# Altium PCB RobotCtrl_V2_Core-board.PcbDoc
Units mil, origin at the board's own origin, x right, y up, seen from the top; angles counter-clockwise.
Board outline 1880 x 1545 mil, 2 copper layers (Top Layer, Bottom Layer); 44 components, 126 nets, 358 pads, 174 vias.
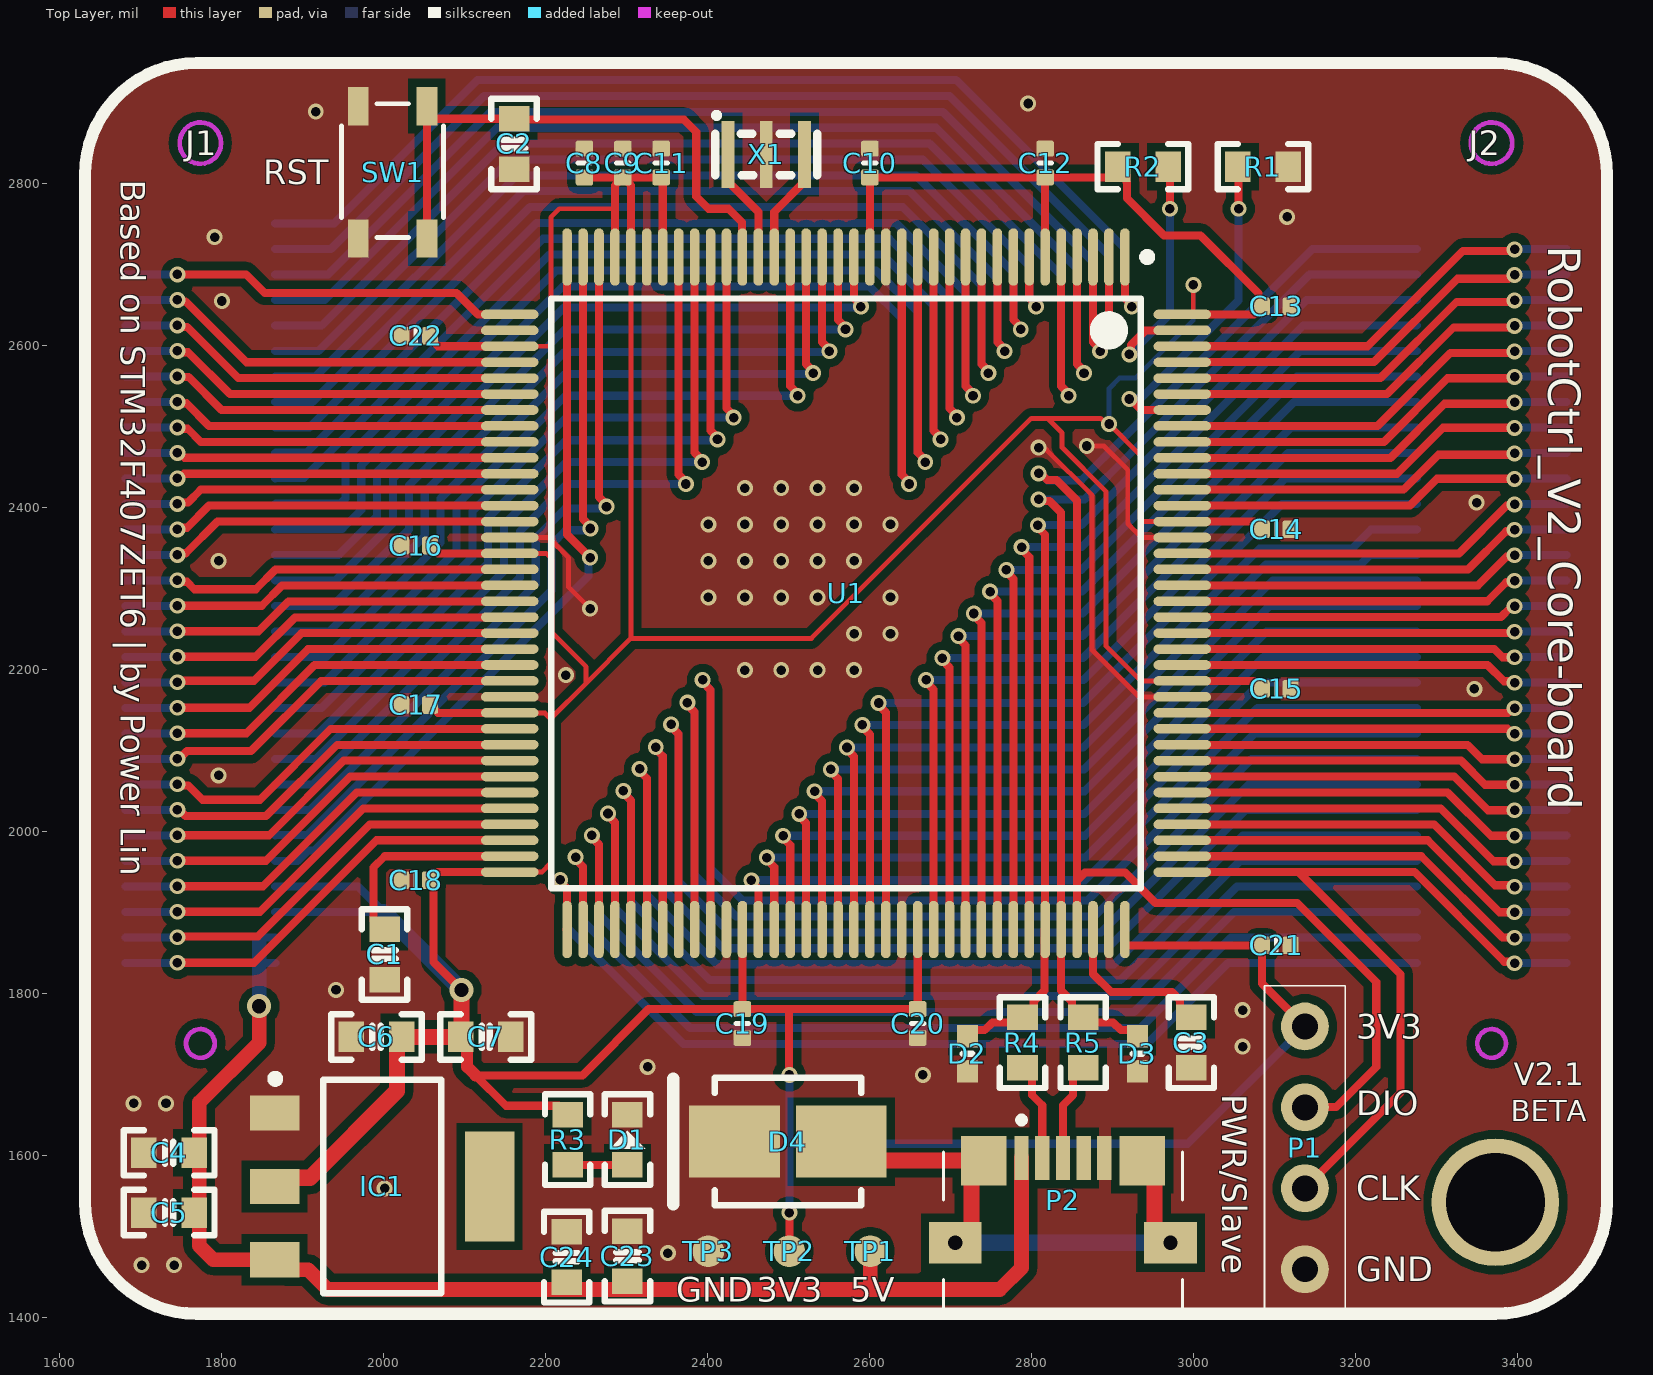
[diagram p0: Top Layer view]
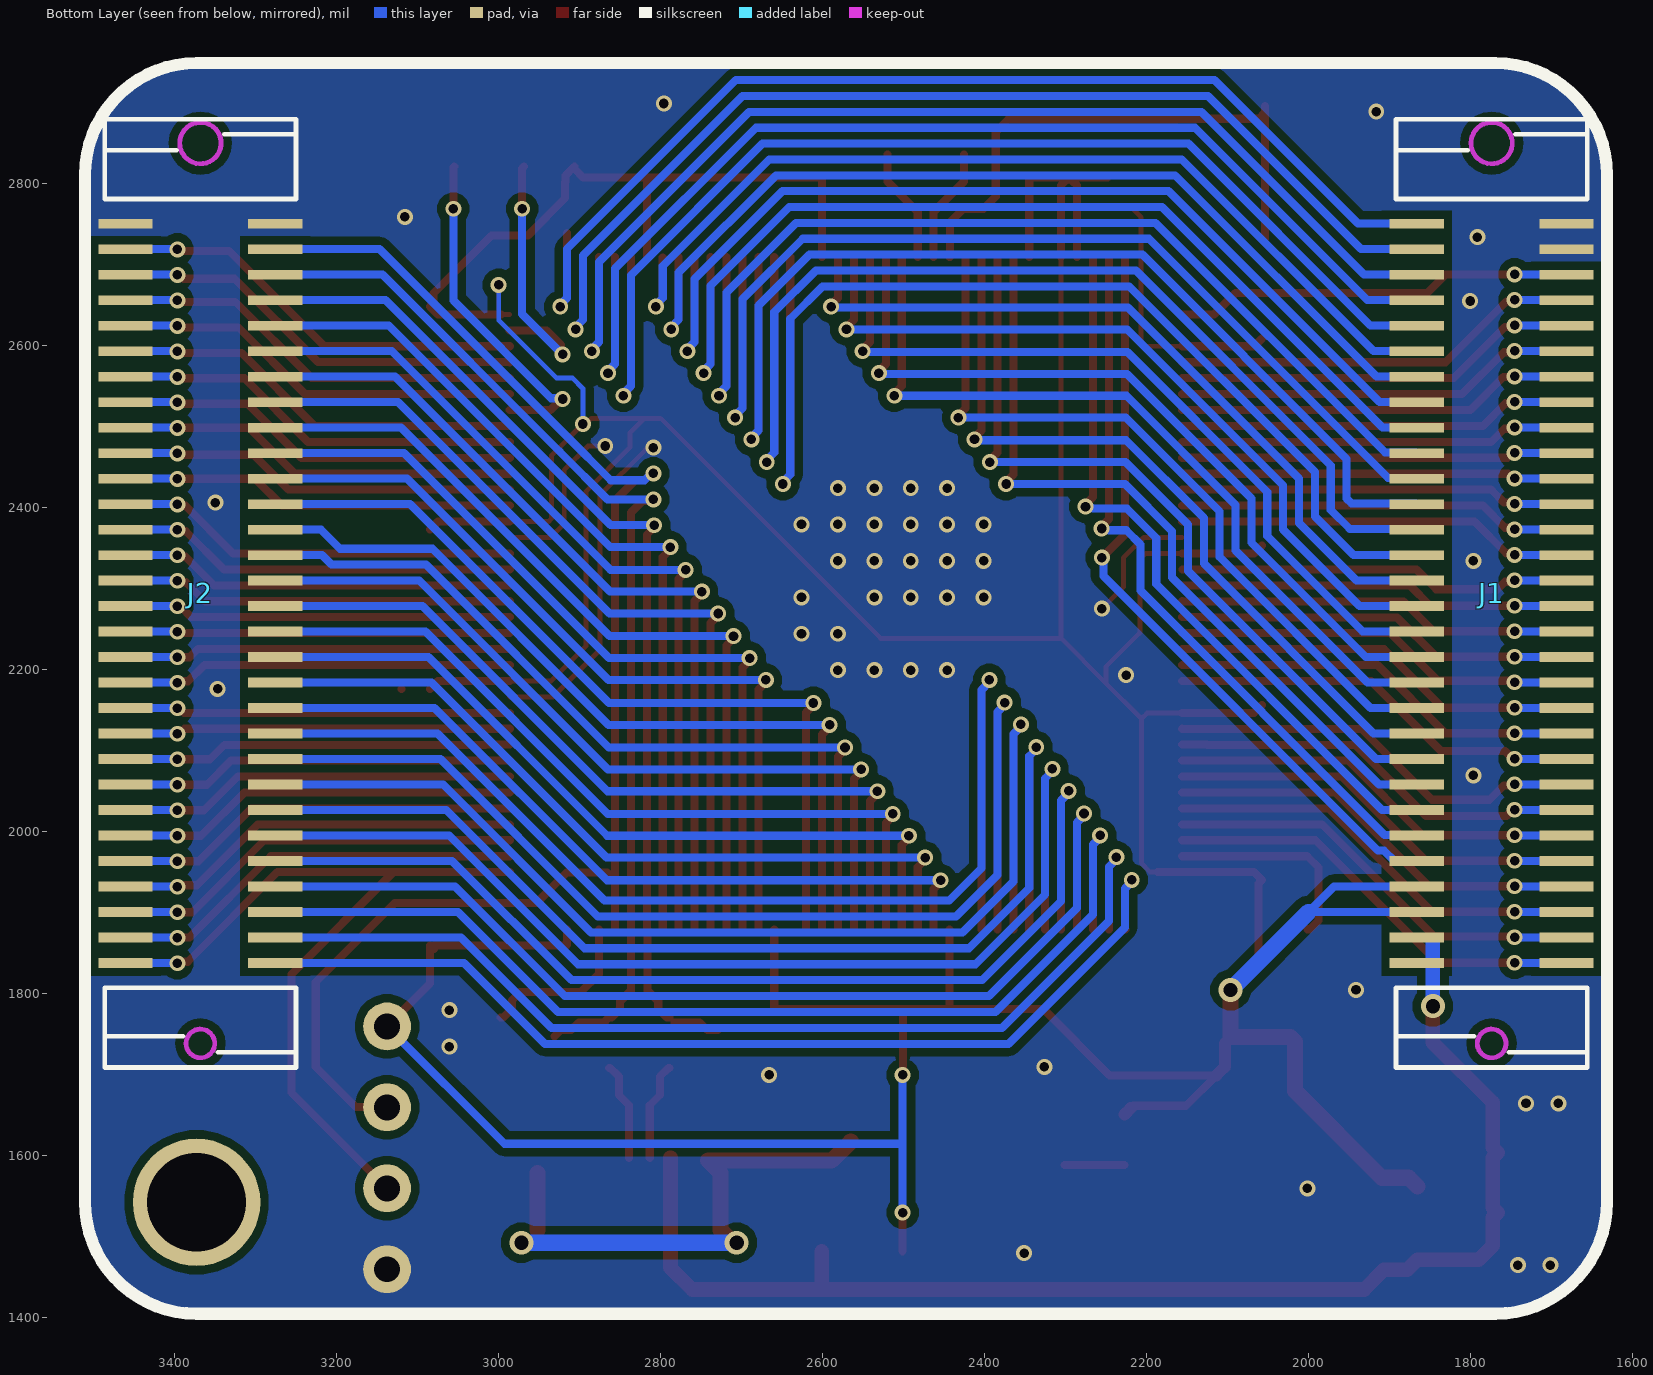
[diagram p1: Bottom Layer view, seen from below]
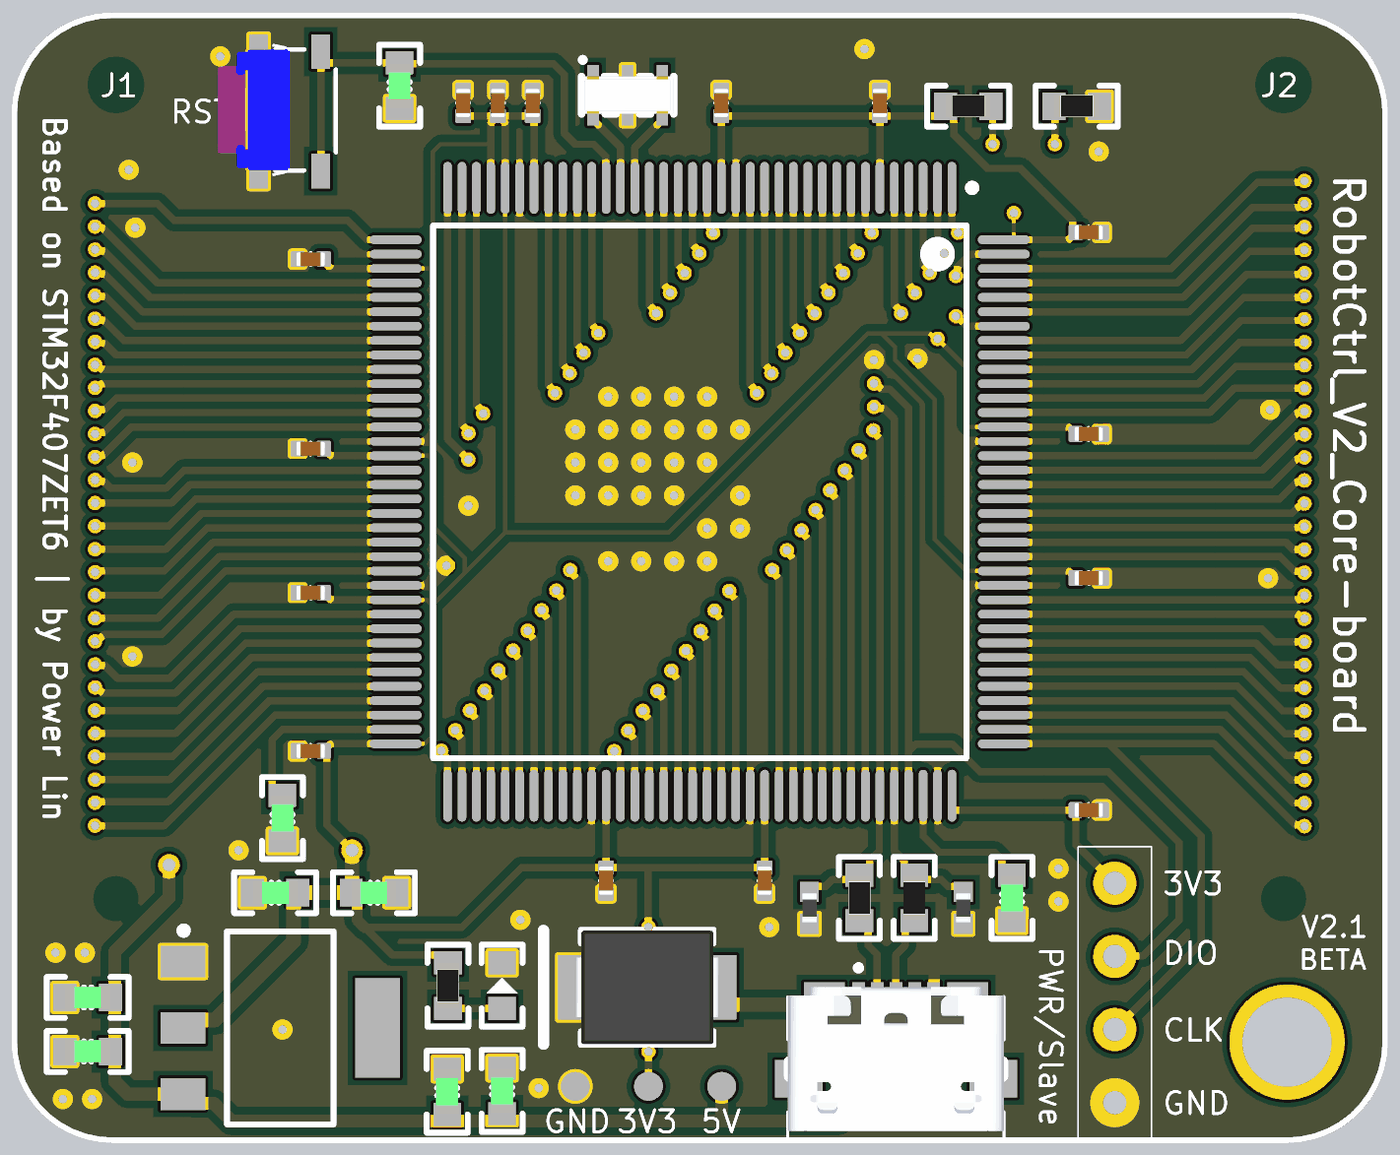
[diagram p2: 3D render of the assembled board from above, using the file's embedded part models]

## Layer stack, top to bottom
Top Solder: solder mask 0.4, Solder Resist, Dk 3.5
Top Layer: signal copper 1.4
Dielectric 1: dielectric 12.6, FR-4, Dk 4.8
Bottom Layer: signal copper 1.4
Bottom Solder: solder mask 0.4, Solder Resist, Dk 3.5

## Board outline
1768.8,1404 cw(c1768.8,1541.8) 1631,1541.8 1631,2811.2 cw(c1768.8,2811.2) 1768.8,2949 3373.2,2949 cw(c3373.2,2811.2) 3511,2811.2 3511,1541.8 cw(c3373.2,1541.8) 3373.2,1404

## Design rules (kind name [scope] priority, off if disabled: settings)
Clearance [All] p1: gap=10 ignorepadtopadclearanceinfootprint=FALSE except(0: Arc-Hole Track-Hole SMDPad-Hole THPad-Hole Via-Hole Fill-Hole Poly-Hole Region-Hole Text-Hole; 2: Arc-SMDPad Track-SMDPad SMDPad-SMDPad; 9.6: Arc-Arc Arc-Track Track-Track)
PlaneConnect [All] p1: planeconnectstyle=Direct reliefexpansion=20 reliefentries=4 reliefconductorwidth=10 reliefairgap=10
PolygonConnect [All] p1: connectstyle=Direct reliefconductorwidth=10 reliefentries=4 polygonreliefangle="90 Angle" airgapwidth=10
RoutingVias [All] p1: holewidth=11.81 width=19.68 viastyle="Through Hole" minholewidth=11.81 minwidth=19.68 maxholewidth=11.81 maxwidth=19.68
SolderMaskExpansion [All] p1: expansion=4 istentingtop=FALSE
Width [All] p1: maxlimit=100 minlimit=6 preferedwidth=10
29 further rules are at their usual default settings.

## Components (designator, comment, footprint, x,y, rotation, side; value= is the part's Value field where it differs from the comment)
C1 "2.2uF" CAP-0603 2001,1847.9 r270 top
C2 "100nF" CAP-0603 2161,2849 r90 top
C3 "2.2uF" CAP-0603 2997.55,1738.9 r270 top
C4 "10uF" CAP-0603 1734.9,1602.88 r0 top
C5 "100nF" CAP-0603 1734.9,1529 r0 top
C6 "100nF" CAP-0603 1991,1746.01 r0 top
C7 "10uF" CAP-0603 2126,1746.01 r180 top
C8 "1uF" CAP-0402 2247.94,2825.46 r270 top
C9 "100nF" CAP-0402 2295.35,2825.46 r270 top
C10 "10uF" CAP-0402 2600.53,2825.46 r270 top
C11 "100nF" CAP-0402 2342.77,2825.46 r270 top
C12 "100nF" CAP-0402 2817.06,2825.46 r270 top
C13 "100nF" CAP-0402 3102.46,2648.49 r180 top
C14 "100nF" CAP-0402 3102.46,2373 r180 top
C15 "100nF" CAP-0402 3102.46,2176 r180 top
C16 "100nF" CAP-0402 2039.54,2353 r0 top
C17 "100nF" CAP-0402 2039.54,2156 r0 top
C18 "100nF" CAP-0402 2039.54,1939.72 r0 top
C19 "100nF" CAP-0402 2443.05,1762.54 r90 top
C20 "100nF" CAP-0402 2659.58,1762.54 r90 top
C21 "100nF" CAP-0402 3102.46,1859 r180 top
C22 "100nF" CAP-0402 2039.54,2612 r0 top
C23 "10uF" CAP-0603 2301,1475.1 r270 top
C24 "100nF" CAP-0603 2226,1474 r270 top
D1 "RED" LED-0603 2301,1619 r90 top
D2 "PESD0402-140" D-0402 2721,1725.22 r90 top
D3 "PESD0402-140" D-0402 2931,1725.22 r90 top
D4 "SMBJ15CA" DO-214AA/SMB 2499.27,1616.71 r0 top
IC1 "AMS1117-3.3" SOT-223 1991,1537.3 r270 top
J1 "3710M060037G3FT01" 3710M060037G3FT01 1866.04,1837.31 r0 bottom locked
J2 "3710M060037G3FT01" 3710M060037G3FT01 3461,1837.31 r0 bottom locked
P1 "HDR1x4_2.54" HDR1X4_2.54 3137.91,1459 r180 top
P2 "MicroQTJ" USB-MICRO 2839,1518.75 r0 top
R1 "10k" R-0603 3086,2821 r180 top
R2 "120R" R-0603 2937.71,2821 r0 top
R3 "4.7k" R-0603 2227.12,1619 r90 top
R4 "10R" R-0603 2789,1738.9 r270 top
R5 "10R" R-0603 2864,1738.9 r270 top
SW1 "KEY" KEY-4P-4.2*3.4*2.5 2011,2814 r270 top
TP1 "TestPoint" TestPoint 2601,1481.29 r90 top
TP2 "TestPoint" TestPoint 2501,1481.29 r90 top
TP3 "TestPoint" TestPoint 2401,1481.29 r90 top
U1 "STM32F407ZET6" STM-LQFP144_N 2571,2294 r270 top locked
X1 "8MHz" SMD3213-3P 2472.5,2836 r0 top

## Footprints (in the part's own frame and the unit in brackets; to place one, negate y for a bottom-side part, rotate by r counter-clockwise, add the part's x,y. Pads: shape width x height; smd on the part's side, far side on the other; paste and mask are expansions set on the pad)
3710M060037G3FT01 [mm]
  rect 1.7x0.3 smd: 1(-4.7,0) 2(-4.7,-0.8) 3(-4.7,-1.6) 4(-4.7,-2.4) 5(-4.7,-3.2) 6(-4.7,-4) 7(-4.7,-4.8) 8(-4.7,-5.6) 9(-4.7,-6.4) 10(-4.7,-7.2) 11(-4.7,-8) 12(-4.7,-8.8) 13(-4.7,-9.6) 14(-4.7,-10.4) 15(-4.7,-11.2) 16(-4.7,-12) 17(-4.7,-12.8) 18(-4.7,-13.6) 19(-4.7,-14.4) 20(-4.7,-15.2) 21(-4.7,-16) 22(-4.7,-16.8) 23(-4.7,-17.6) 24(-4.7,-18.4) 25(-4.7,-19.2) 26(-4.7,-20) 27(-4.7,-20.8) 28(-4.7,-21.6) 29(-4.7,-22.4) 30(-4.7,-23.2) 31(0,-23.2) 32(0,-22.4) 33(0,-21.6) 34(0,-20.8) 35(0,-20) 36(0,-19.2) 37(0,-18.4) 38(0,-17.6) 39(0,-16.8) 40(0,-16) 41(0,-15.2) 42(0,-14.4) 43(0,-13.6) 44(0,-12.8) 45(0,-12) 46(0,-11.2) 47(0,-10.4) 48(0,-9.6) 49(0,-8.8) 50(0,-8) 51(0,-7.2) 52(0,-6.4) 53(0,-5.6) 54(0,-4.8) 55(0,-4) 56(0,-3.2) 57(0,-2.4) 58(0,-1.6) 59(0,-0.8) 60(0,0)
  Keep-Out Layer circle w0.152: c-2.35,-25.725 r0.65
  Keep-Out Layer circle w0.152: c-2.35,2.525 r0.45
  silkscreen extent -5.35,-26.47 0.65,3.27
CAP-0402 [mm]
  rrect25% 0.5x0.55 smd: 1(-0.45,0) 2(0.45,0)
  silkscreen extent 0,-0.2 0,0.2, body extent -0.5,-0.25 0.5,0.25, height 0.6
CAP-0603 [mm]
  rect 0.8x0.96 smd: 1(-0.79,0) 2(0.79,0)
  silkscreen extent -1.42,-0.71 1.42,0.71, body extent -0.76,-0.39 0.76,0.39, height 0.9
D-0402 [mm]
  rect 0.7x0.65 smd: 1(-0.55,0) 2(0.55,0)
  silkscreen extent 0,-0.15 0,0.15, body extent -0.5,-0.25 0.5,0.25, height 0.43
DO-214AA/SMB [mm]
  rect 2.85x2.25 smd: 1(1.675,0) 2(-1.675,0)
  silkscreen extent -3.6,-2 2.3,2, body extent -2.5,-1.97 2.5,1.97, height 2.44
HDR1X4_2.54 [mm]
  round 1.5 hole 0.813: 1(0,0) 2(0,-2.54) 3(0,-5.08) 4(0,-7.62)
  silkscreen extent -1.27,-8.89 1.27,1.27
KEY-4P-4.2*3.4*2.5 [mm] "SKRPABE010"
  rect 1.2x0.65 smd: 1(-2.075,1.075) 1(2.075,1.075) 2(-2.075,-1.075) 2(2.075,-1.075)
  silkscreen extent -2.15,-1.6 2.05,1.6, body extent -2.35,-1.6 2.25,1.6, height 2.5
LED-0603 [mm]
  rect 0.8x0.96 smd: 1(-0.79,0) 2(0.79,0)
  silkscreen extent -1.42,-0.71 1.42,0.71, body extent -0.81,-0.4 0.81,0.4, height 0.6
R-0603 [mm]
  rect 0.8x0.96 smd: 1(-0.79,0) 2(0.79,0)
  silkscreen extent -1.42,-0.71 1.42,0.71, body extent -0.76,-0.38 0.76,0.38, height 0.41
SMD3213-3P [mm]
  rect 0.4x2.1 smd: 1(-1.2,0) 2(0,0) 3(1.2,0)
  silkscreen extent -1.6,-0.65 1.6,1.27, body extent -1.6,-0.65 1.6,0.65, height 0.7
SOT-223 [mm]
  rect 1.1x1.55 smd: 1(-2.91,-3.197) 2(-0.61,-3.197) 3(1.69,-3.197)
  rect 3.45x1.55 smd: 4(-0.61,3.553)
  silkscreen extent -4.11,-3.3 2.74,2.03, body extent -3.88,-3.38 2.62,3.58, height 1.7
STM-LQFP144_N [mm] "Thin QFP, 144-Leads, Body 20x20mm, Pitch 0.5mm, IPC Medium Density"
  oval 1.8x0.3 smd: 1(-10.55,8.75) 2(-10.55,8.25) 3(-10.55,7.75) 4(-10.55,7.25) 5(-10.55,6.75) 6(-10.55,6.25) 7(-10.55,5.75) 8(-10.55,5.25) 9(-10.55,4.75) 10(-10.55,4.25) 11(-10.55,3.75) 12(-10.55,3.25) 13(-10.55,2.75) 14(-10.55,2.25) 15(-10.55,1.75) 16(-10.55,1.25) 17(-10.55,0.75) 18(-10.55,0.25) 19(-10.55,-0.25) 20(-10.55,-0.75) 21(-10.55,-1.25) 22(-10.55,-1.75) 23(-10.55,-2.25) 24(-10.55,-2.75) 25(-10.55,-3.25) 26(-10.55,-3.75) 27(-10.55,-4.25) 28(-10.55,-4.75) 29(-10.55,-5.25) 30(-10.55,-5.75) 31(-10.55,-6.25) 32(-10.55,-6.75) 33(-10.55,-7.25) 34(-10.55,-7.75) 35(-10.55,-8.25) 36(-10.55,-8.75) 73(10.55,-8.75) 74(10.55,-8.25) 75(10.55,-7.75) 76(10.55,-7.25) 77(10.55,-6.75) 78(10.55,-6.25) 79(10.55,-5.75) 80(10.55,-5.25) 81(10.55,-4.75) 82(10.55,-4.25) 83(10.55,-3.75) 84(10.55,-3.25) 85(10.55,-2.75) 86(10.55,-2.25) 87(10.55,-1.75) 88(10.55,-1.25) 89(10.55,-0.75) 90(10.55,-0.25) 91(10.55,0.25) 92(10.55,0.75) 93(10.55,1.25) 94(10.55,1.75) 95(10.55,2.25) 96(10.55,2.75) 97(10.55,3.25) 98(10.55,3.75) 99(10.55,4.25) 100(10.55,4.75) 101(10.55,5.25) 102(10.55,5.75) 103(10.55,6.25) 104(10.55,6.75) 105(10.55,7.25) 106(10.55,7.75) 107(10.55,8.25) 108(10.55,8.75)
  oval 0.3x1.8 smd: 37(-8.75,-10.55) 38(-8.25,-10.55) 39(-7.75,-10.55) 40(-7.25,-10.55) 41(-6.75,-10.55) 42(-6.25,-10.55) 43(-5.75,-10.55) 44(-5.25,-10.55) 45(-4.75,-10.55) 46(-4.25,-10.55) 47(-3.75,-10.55) 48(-3.25,-10.55) 49(-2.75,-10.55) 50(-2.25,-10.55) 51(-1.75,-10.55) 52(-1.25,-10.55) 53(-0.75,-10.55) 54(-0.25,-10.55) 55(0.25,-10.55) 56(0.75,-10.55) 57(1.25,-10.55) 58(1.75,-10.55) 59(2.25,-10.55) 60(2.75,-10.55) 61(3.25,-10.55) 62(3.75,-10.55) 63(4.25,-10.55) 64(4.75,-10.55) 65(5.25,-10.55) 66(5.75,-10.55) 67(6.25,-10.55) 68(6.75,-10.55) 69(7.25,-10.55) 70(7.75,-10.55) 71(8.25,-10.55) 72(8.75,-10.55) 109(8.75,10.55) 110(8.25,10.55) 111(7.75,10.55) 112(7.25,10.55) 113(6.75,10.55) 114(6.25,10.55) 115(5.75,10.55) 116(5.25,10.55) 117(4.75,10.55) 118(4.25,10.55) 119(3.75,10.55) 120(3.25,10.55) 121(2.75,10.55) 122(2.25,10.55) 123(1.75,10.55) 124(1.25,10.55) 125(0.75,10.55) 126(0.25,10.55) 127(-0.25,10.55) 128(-0.75,10.55) 129(-1.25,10.55) 130(-1.75,10.55) 131(-2.25,10.55) 132(-2.75,10.55) 133(-3.25,10.55) 134(-3.75,10.55) 135(-4.25,10.55) 136(-4.75,10.55) 137(-5.25,10.55) 138(-5.75,10.55) 139(-6.25,10.55) 140(-6.75,10.55) 141(-7.25,10.55) 142(-7.75,10.55) 143(-8.25,10.55) 144(-8.75,10.55)
  silkscreen extent -10.67,-9.25 9.25,9.58, body extent -10,-10 10,10, height 1.6
TestPoint [mm]
  round 1 smd: 1(0,0)
USB-MICRO [mm]
  rect 0.45x1.38 smd: 1(-1.3,1.975) 2(-0.65,1.975) 3(0,1.975) 4(0.65,1.975) 5(1.3,1.975)
  rect 1.65x1.3 smd: EH(-3.375,-0.685) EH(3.375,-0.685)
  rect 1.425x1.55 smd: EH(-2.487,1.89) EH(2.487,1.89)
  silkscreen extent -3.75,-2.84 3.75,3.26, body extent -3.9,-2.5 3.9,2.5, height 2.72

## Part data
C1 C2 C3 C4 C5 C6 C7 C8 C9 C10 C11 C12 C13 C14 C15 C16 C17 C18 C19 C20 C21 C22 C23 C24: library part CAP, "贴片电容", Package=0402, SuppliersPartNumber=C52923, ComponentLink1Description=供应商链接, ComponentLink1URL=http://www.szlcsc.com/product/details_53938.html, Supplier=LC
D1: library part LED, "发光二极管", Package=0603, SuppliersPartNumber=C2290, ComponentLink1Description=供应商链接, ComponentLink1URL=http://www.szlcsc.com/product/details_2663.html, Supplier=LC
D2 D3 D4: library part TVS_C
IC1: library part AMS1117, "AMS1117-3.3 1.0A", Manufacturer_Name=Nexperia, Manufacturer_Part_Number=SI2302DS, Mouser Part Number=N/A, RS Part Number=7983053P, Datasheet Link=https://assets.nexperia.com/documents/data-sheet/SI2302DS.pdf, Height=1.1mm, Mouser Price/Stock=https://www.mouser.com/Search/Refine.aspx?Keyword=N%2FA, RS Price/Stock=http://uk.rs-online.com/web/p/products/7983053P
J1 J2: library part 3710M/F, "B2B Connector"
P1: "Header"
P2: library part USB_MICRO, "USB_MICRO"
R1 R2 R3 R4 R5: library part RES, "贴片电阻", Package=0805, SuppliersPartNumber=C17798, Supplier=LC
SW1: "按键开关"
TP1 TP2 TP3: "测试点"
U1: "ARM Cortex-M4 32-bit MCU+FPU, 210 DMIPS, 512 kB Flash, 192 kB Internal RAM, 114 I/Os, 144-pin LQFP, -40 to 85 degC, Tray", I/Os (High Current)=114, Manufacturer=STMicroelectronics, Operating Frequency(F) (Processor speed) (MHz)=168, Supplier Part Number 1=497-11903-ND, Supply Voltage(Vcc) max (V)=3.6, Supply Voltage(Vcc) min (V)=1.8, ComponentLink1Description="Manufacturer URL", ComponentLink1URL=http://www.st.com/web/en/home.html, ComponentLink2Description=Datasheet, ComponentLink2URL=http://www.st.com/st-web-ui/static/active/en/resource/technical/document/datasheet/DM00037051.pdf, ComponentLink3Description="Package Specification", ComponentLink3URL=http://www.st.com/st-web-ui/static/active/en/resource/technical/document/datasheet/DM00037051.pdf, Core="ARM Cortex-M4", D/A Converter=2x12-bit, DatasheetVersion="Rev. 4", FLASH Size (Prog) (kB)=512, Internal RAM Size (kB)=192, Mounting Technology="Surface Mount", PackageDescription="144-Pin Low Profile Quad Flat Package, 20 x 20 mm Body, 0.5 mm Pitch", PackageReference=LQFP144, PackageVersion="Rev. 4, 06/2013", Packing=Tray, PartNumber=STM32F407ZET6, Supplier 1=Digi-Key, Supplier 2=Farnell, Supplier 3=Newark, Supplier 4=Newark, Supplier 5=Mouser, Supplier Part Number 2=2215229, Supplier Part Number 3=46W2203, Supplier Part Number 4=87T3795, Supplier Part Number 5=511-STM32F407ZET6
X1: library part XTAL, "CSTCE8M00G15C99-R0"

## Free pads (board coordinates)
  round 157.48 hole 122.05: 2(3373.2,1541.8)

## Via types
v1: diameter 19.68, hole 11.81, Top Layer to Bottom Layer, 170 vias
v2: diameter 29.53, hole 17.72, Top Layer to Bottom Layer, 4 vias

## Nets (pads, with @x,y where several pads share a name; then routed paths per layer and width w, separated by ;. In a path a pad name is that pad's centre, name@x,y a point inside that pad or via, vN(x,y) a via of type N, cw(c..) or ccw(c..) an arc to the next point about the centre after c; other vN are vias at no path point)
GND: C1.2 C2.1 C3.2 C4.1 C5.1 C6.1 C7.1 C8.1 C9.1 C10.1 C11.1 C12.1 C13.1 C14.1 C15.1 C16.1 C17.1 C18.1 C19.1 C20.1 C21.1 C22.1 C23.1 C24.1 D1.2 D2.1 D3.1 D4.2 IC1.1 J1.29 J1.30 J2.30 J2.31 P1.1 P2.5 R1.1 SW1.2 TP3.1 U1.16 U1.31 U1.38 U1.51 U1.61 U1.83 U1.94 U1.107 U1.120 U1.130 X1.2 | length 777.6
  Top Layer w6: U1.51 2203.16,2362.9 2228.33,2337.73 2228.33,2301.67 v1(2255,2275) ; v1(2809,2474) 2811.62,2471.38 2818.51,2471.38 2875,2414.89 2875,2223.94 2932.89,2166.05 U1.120 ; v1(2868.36,2475.95) 2889.54,2475.95 2919,2446.49 2919,2380.04 2936.14,2362.9 U1.130
  Top Layer w10: C15.1 C15.1@3120.25,2175.92 ; v1@3347.22,2175.92 v1(3347.3,2175.84)
  other v1: 1701,1464 1741,1464 2351,1479 2001,1559 1691,1664 1731,1664 2666,1699 2326,1709 3061,1734 3061,1779 1941,1804 1796,2069 2225,2193 2446,2199 2491,2199 2536,2199 2581,2199 2581,2244 2626,2244 2401,2289 2446,2289 2491,2289 2536,2289 2626,2289 1796,2334 2401,2334 2446,2334 2491,2334 2536,2334 2581,2334 2401,2379 2446,2379 2491,2379 2536,2379 2581,2379 2626,2379 3350,2406 2446,2424 2491,2424 2536,2424 2581,2424 1800,2655 1791,2734 3116,2759 1916,2889 2796,2899
NetC1_1: C1.1 U1.71 | length 258.1
  Top Layer w10: C1.1 1997.85,1879 1987.1,1889.75 1987.1,1955.1 2001.2,1969.2 U1.71
NetC2_2: C2.2 SW1.1 U1.25 | length 698.9
  Top Layer w10: SW1.1@2053.32,2732.31 SW1.1@2053.32,2887.9 ; SW1.1@2053.32,2895.69 SW1.1@2053.32,2887.9 ; U1.25 2442.7,2709.7 2442.7,2752.3 2426,2769 2401,2769 2386,2784 2386,2864 2371,2879 2162.1,2879 C2.2 2061.12,2880.1 SW1.1@2053.32,2887.9
NetC3_1: C3.1 U1.106 | length 204.7
  Top Layer w10: U1.106 2876.12,1823.88 2898.66,1801.34 2973.66,1801.34 2983.66,1791.34 2983.66,1780.75 2994.4,1770 C3.1
NetD1_A: D1.1 R3.1 | length 73.9
  Top Layer w10: R3.1 D1.1
NetD4_1: D4.1 P2.EH | length 640.4
  Top Layer w20: D4.1 2588.75,1593.16 2741.09,1593.16 2726,1578.08 2726,1507.38 2710.41,1491.79 v2(2706.13,1491.79) ; P2.EH@2952,1507.38 P2.EH@2952,1578.08
  Bottom Layer w20: v2(2706.13,1491.79) v2(2971.87,1491.79)
NetP2_2: P2.2 R4.2 | length 122.1
  Top Layer w10: R4.2 2790.25,1707.8 2801,1697.05 2801,1674 2813.41,1661.59 P2.2
NetP2_3: P2.3 R5.2 | length 122.1
  Top Layer w10: P2.3 2839,1661.59 2851.41,1674 2851.41,1697.05 2862.16,1707.8 R5.2@2863.41,1707.8
NetR1_2: R1.2 U1.138 | length 422.2
  Top Layer w10: v1(2921,2534) 2922.3,2534 2935.92,2520.38 U1.138 ; R1.2 3056,2819.9 v1(3056,2769)
  Bottom Layer w10: v1(2921,2534) 2921.93,2534.93 2935.21,2534.93 3056,2655.72 v1(3056,2769)
NetR2_2: R2.2 U1.143 | length 337.2
  Top Layer w10: v1(2921,2589) 2922.85,2590.85 2922.85,2600.85 2940.8,2618.8 U1.143 ; R2.2 2971,2818.81 v1(2971,2769)
  Bottom Layer w10: v1(2921,2589) 2971,2639 v1(2971,2769)
NetU1_23: U1.23 X1.3 | length 142.2
  Top Layer w10: U1.23 2482.42,2765.06 2519.89,2802.54 X1.3@2519.89,2836
NetU1_24: U1.24 X1.1 | length 142.2
  Top Layer w10: X1.1 2425.26,2802.54 2462.73,2765.06 U1.24
PA0: J1.54 U1.34 | length 910
  Top Layer w10: U1.34 2265.88,2412.89 2275.15,2403.62 v1(2275.15,2401)
  Bottom Layer w10: J1.54 1908.72,2026.28 2187.8,2305.36 2187.8,2362.5 2224.14,2398.84 2266.14,2398.84 2266.45,2399.15 2273.3,2399.15 v1(2275.15,2401)
PA1: J1.55 U1.35 | length 918.3
  Top Layer w10: U1.35 2246.2,2385.57 2255.15,2376.62 v1(2255.15,2374)
  Bottom Layer w10: J1.55 1866.88,1995.63 1905.78,1995.63 2207.4,2297.24 2207.4,2354.38 2224.86,2371.84 2246.14,2371.84 2246.45,2372.15 2253.3,2372.15 v1@2254.85,2373.7
PA2: J1.56 U1.36 | length 939.6
  Top Layer w10: U1.36 2226.51,2366.49 v1(2255,2338)
  Bottom Layer w10: J1.56 1893.6,1963.29 1906.33,1976.03 1913.9,1976.03 2253.15,2315.27 2253.15,2336.15 v1(2255,2338)
PA3: J1.28 U1.37 | length 494.9
  Top Layer w10: v1(1745,2688.01) 1830,2688.01 1853.01,2665 2090,2665 2116.51,2638.49 U1.37
  Bottom Layer w10: J1.28 v1@1744.69,2687.7
PA4: J1.27 U1.40 | length 506.3
  Top Layer w10: v1(1745,2656.51) 1746.85,2654.66 1755.34,2654.66 1830.57,2579.43 U1.40
  Bottom Layer w10: J1.27 v1@1744.69,2656.2
PA5: J1.26 U1.41 | length 501.4
  Top Layer w10: v1(1745,2625.02) 1746.85,2623.16 1756.84,2623.16 1820.25,2559.75 U1.41
  Bottom Layer w10: J1.26 v1@1744.69,2624.71
PA6: J1.25 U1.42 | length 496.5
  Top Layer w10: v1(1745,2593.52) 1746.83,2591.69 1758.31,2591.69 1809.94,2540.06 U1.42
  Bottom Layer w10: J1.25 v1@1744.69,2593.21
PA7: J1.24 U1.43 | length 491.6
  Top Layer w10: v1(1745,2562.02) 1746.08,2560.95 1759.05,2560.95 1799.62,2520.38 U1.43
  Bottom Layer w10: J1.24 v1@1744.69,2561.72
PA8: J2.24 U1.100 | length 1058.1
  Top Layer w10: v1(2749,2296) 2749,2293.38 2758.01,2284.37 U1.100
  Bottom Layer w10: v1(2749,2296) 2862.59,2296 3128.31,2561.72 J2.24
PA9: J2.25 U1.101 | length 1066.8
  Top Layer w10: v1(2769,2323) 2769,2320.38 2777.69,2311.69 U1.101
  Bottom Layer w10: v1(2769,2323) 2861.87,2323 3132.09,2593.21 J2.25
PA10: J2.26 U1.102 | length 1077.6
  Top Layer w10: v1(2788,2351) 2788,2348.38 2797.38,2339 U1.102
  Bottom Layer w10: v1(2788,2351) 2862.15,2351 3135.86,2624.71 J2.26
PA11: D2.2 J2.27 R4.1 U1.103 | length 1266.2
  Top Layer w10: D2.2@2729.46,1754.33 2742.33,1754.33 2752,1764 R4.1@2783,1764 ; R4.1 2792.15,1770 2802.9,1780.75 2802.9,1789.9 2816.25,1803.25 U1.103@2816.25,1878.65 ; v1(2808,2378) 2808,2375.38 2817.06,2366.32 U1.103 2817.06,1878.13 U1.103@2817.11,1878.18
  Bottom Layer w10: v1(2808,2378) 2808.3,2378.3 2861.74,2378.3 3139.64,2656.2 J2.27
PA12: D3.2 J2.28 R5.1 U1.104 | length 1329.9
  Top Layer w10: v1(2809,2410) 2810.85,2408.15 2822.23,2408.15 2836.75,2393.63 U1.104 2836.75,1803.25 2850.1,1789.9 2850.1,1780.75 2860.85,1770 R5.1 2870,1764 2901,1764 2910.67,1754.33 2923.54,1754.33 D3.2
  Bottom Layer w10: v1(2809,2410) 2865.72,2410 2924.52,2468.8 3143.42,2687.7 J2.28
PA13: J2.29 P1.3 U1.105 | length 1823.2
  Top Layer w10: v1(2809,2442) 2811.62,2442 2818.78,2434.84 2818.86,2434.84 2819.7,2434 2831,2434 2856.43,2408.57 2856.43,1939.43 ; U1.105 2856.43,1939.43 ; P1.3 3138.49,1659.58 3176.58,1659.58 3226,1709 3226,1814 3128.42,1911.58 2953.42,1911.58 2916,1949 2866,1949 2856.43,1939.43
  Bottom Layer w10: v1(2809,2442) 2811.27,2442 2819.7,2433.57 2861.57,2433.57 2916.4,2488.4 3147.2,2719.2 J2.29
PA14: J2.60 P1.2 U1.109 | length 1012.6
  Top Layer w10: U1.109 3129.92,1949.51 ; P1.2 3256,1677.09 3256,1823.43 3129.92,1949.51 ; v1(3397,1837) 3395.15,1838.85 3384.15,1838.85 3273.49,1949.51 3129.92,1949.51
  Bottom Layer w10: v1@3397.31,1837.31 J2.60
PA15: J2.59 U1.110 | length 516.1
  Top Layer w10: U1.110 2986.44,1969.11 3281.61,1969.11 3382.05,1868.67 3396.82,1868.67 v1(3397,1868.5)
  Bottom Layer w10: v1@3397.31,1868.8 J2.59
PB0: J1.21 U1.46 | length 476.9
  Top Layer w10: v1(1745,2467.54) 1747.62,2467.54 1753.75,2461.41 2155.56,2461.41 U1.46
  Bottom Layer w10: J1.21 v1@1744.69,2467.23
PB1: J1.20 U1.47 | length 476.1
  Top Layer w10: v1@1745.41,2436.45 1748.03,2436.45 1753.22,2441.64 U1.47
  Bottom Layer w10: J1.20 v1@1744.69,2435.73
  other v1: 1745,2436.04
PB2: J1.19 U1.48 | length 481.5
  Top Layer w10: v1(1745,2404.54) 1746.79,2406.34 1758.34,2406.34 1773.95,2421.95 U1.48
  Bottom Layer w10: J1.19 v1@1744.69,2404.24
PB3: J2.40 U1.133 | length 493
  Top Layer w10: U1.133 3259.7,2421.95 3302.82,2465.07 3395.15,2465.07 v1(3397,2466.92)
  Bottom Layer w10: v1@3397.31,2467.23 J2.40
PB4: J2.39 U1.134 | length 497.9
  Top Layer w10: U1.134 3251.67,2441.64 3308.45,2498.42 v1(3397,2498.42)
  Bottom Layer w10: v1@3397.31,2498.72 J2.39
PB5: J2.38 U1.135 | length 502.7
  Top Layer w10: U1.135 3243.63,2461.32 3310.37,2528.06 3395.15,2528.06 v1(3397,2529.91)
  Bottom Layer w10: v1@3397.31,2530.22 J2.38
PB6: J2.37 U1.136 | length 507.6
  Top Layer w10: U1.136 3235.6,2481.01 3314.15,2559.56 3395.15,2559.56 v1(3397,2561.41)
  Bottom Layer w10: v1@3397.31,2561.72 J2.37
PB7: J2.36 U1.137 | length 512.5
  Top Layer w10: U1.137 3227.57,2500.69 3317.93,2591.05 3395.15,2591.05 v1(3397,2592.91)
  Bottom Layer w10: v1@3397.31,2593.21 J2.36
PB8: J2.35 U1.139 | length 509.3
  Top Layer w10: U1.139 U1.139 3239.3,2540.15 3321.7,2622.55 3395.15,2622.55 v1(3397,2624.4)
  Bottom Layer w10: v1@3397.31,2624.71 J2.35
PB9: J2.34 U1.140 | length 514.2
  Top Layer w10: U1.140 3016.55,2559.75 3016.72,2559.92 3231.36,2559.92 3325.48,2654.04 3395.15,2654.04 v1(3397,2655.9)
  Bottom Layer w10: v1@3397.31,2656.2 J2.34
PB10: J1.2 U1.69 | length 532.1
  Top Layer w10: v1(1745,1869.11) 1746.04,1870.15 1844.44,1870.15 1982.76,2008.48 2155.56,2008.48 U1.69
  Bottom Layer w10: J1.2 v1@1744.69,1868.8
PB11: J1.1 U1.70 | length 537
  Top Layer w10: v1(1745,1837.61) 1839.61,1837.61 1990.88,1988.88 U1.70
  Bottom Layer w10: J1.1 v1@1744.69,1837.31
PB12: J2.1 U1.73 | length 1278
  Top Layer w10: v1(2218,1940) 2218,1937.81 2226.51,1929.3 2226.51,1879.16 U1.73@2226,1878.65
  Bottom Layer w10: v1(2218,1940) 2218,1937.81 2226.51,1929.3 2226.51,1880.94 2370.09,1737.36 2942.91,1737.36 3042.86,1837.31 J2.1
PB13: J2.2 U1.74 | length 1306.6
  Top Layer w10: v1(2237,1968) 2237,1965.38 2246.2,1956.18 U1.74
  Bottom Layer w10: v1(2237,1968) 2237,1965.38 2246.2,1956.18 2246.2,1889.09 2378.24,1757.05 2934.76,1757.05 3046.51,1868.8 J2.2
PB14: J2.3 U1.75 | length 1332.6
  Top Layer w10: v1(2257,1995) 2257,1992.38 2265.88,1983.5 U1.75
  Bottom Layer w10: v1(2257,1995) 2257,1992.38 2265.88,1983.5 2265.88,1897.25 2386.39,1776.74 2926.61,1776.74 3050.17,1900.3 J2.3
PB15: J2.4 U1.76 | length 1358.7
  Top Layer w10: v1(2277,2022) 2277,2019.38 2285.57,2010.81 U1.76
  Bottom Layer w10: v1(2277,2022) 2277,2019.38 2285.57,2010.81 2285.57,1905.4 2394.55,1796.42 2918.45,1796.42 3053.83,1931.8 J2.4
PC0: J1.50 U1.26 | length 949.9
  Top Layer w10: U1.26 2423.36,2522.56 2432.3,2513.62 v1(2432.3,2511)
  Bottom Layer w10: J1.50 1922.99,2152.27 2109.4,2338.68 2109.4,2394.97 2225.43,2511 v1(2432.3,2511)
PC1: J1.51 U1.27 | length 959.2
  Top Layer w10: U1.27 2403.68,2495.24 2412.3,2486.62 v1(2412.3,2484)
  Bottom Layer w10: J1.51 1919.21,2120.77 2129,2330.56 2129,2386.86 2225.14,2483 v1@2413.3,2483
PC2: J1.52 U1.28 | length 969.8
  Top Layer w10: U1.28 2383.99,2467.93 2393.3,2458.62 v1(2393.3,2456)
  Bottom Layer w10: J1.52 1916.28,2089.28 2148.6,2321.6 2148.6,2378.74 2225.86,2456 v1(2393.3,2456)
PC3: J1.53 U1.29 | length 978.6
  Top Layer w10: U1.29 2364.31,2440.61 2373.3,2431.62 v1(2373.3,2429)
  Bottom Layer w10: J1.53 1912.5,2057.78 2168.2,2313.48 2168.2,2370.62 2226.58,2429 v1(2373.3,2429)
PC4: J1.23 U1.44 | length 486.7
  Top Layer w10: v1(1745,2530.53) 1746.85,2528.67 1756.33,2528.67 1784.31,2500.69 U1.44
  Bottom Layer w10: J1.23 v1@1744.69,2530.22
PC5: J1.22 U1.45 | length 481.8
  Top Layer w10: v1(1745,2499.03) 1746.85,2497.18 1757.82,2497.18 1773.99,2481.01 U1.45
  Bottom Layer w10: J1.22 v1@1744.69,2498.72
PC6: J2.20 U1.96 | length 1021.2
  Top Layer w10: v1(2670,2187) 2670,2184.38 2679.27,2175.11 U1.96
  Bottom Layer w10: v1(2670,2187) 2864.47,2187 3113.2,2435.73 J2.20
PC7: J2.21 U1.97 | length 1030.5
  Top Layer w10: v1(2690,2214) 2690,2211.38 2698.95,2202.43 U1.97 2698.95,1878.13 U1.97@2699,1878.18
  Bottom Layer w10: v1(2690,2214) 2863.75,2214 3116.98,2467.23 J2.21
PC8: J2.22 U1.98 | length 1039.2
  Top Layer w10: v1(2710,2241) 2710,2238.38 2718.64,2229.74 U1.98 2718.64,1878.13 U1.98@2718.68,1878.18
  Bottom Layer w10: v1(2710,2241) 2863.03,2241 3120.75,2498.72 J2.22
PC9: J2.23 U1.99 | length 1049.4
  Top Layer w10: v1(2729,2269) 2729,2266.38 2738.32,2257.06 U1.99
  Bottom Layer w10: v1(2729,2269) 2863.31,2269 3124.53,2530.22 J2.23
PC10: J2.58 U1.111 | length 511.2
  Top Layer w10: U1.111 3289.56,1988.88 3378.44,1899.99 v1(3397,1899.99)
  Bottom Layer w10: v1@3397.31,1900.3 J2.58
PC11: J2.57 U1.112 | length 506.3
  Top Layer w10: U1.112 2986.44,2008.48 3297.67,2008.48 3372.81,1933.34 3395.15,1933.34 v1(3397,1931.49)
  Bottom Layer w10: v1@3397.31,1931.8 J2.57
PC12: J2.56 U1.113 | length 504
  Top Layer w10: U1.113 3305.62,2028.25 3370.89,1962.98 v1(3397,1962.98) v1@3395.15,1964.84
  Bottom Layer w10: v1@3397.31,1963.29 J2.56
PC13: J1.36 U1.7 | length 1197.7
  Top Layer w10: U1.7@2797.38,2708.84 2797.38,2658.7 v1@2805.89,2650.19
  Bottom Layer w10: J1.36 1919.58,2593.21 2156.25,2829.89 2665.83,2829.89 2797.38,2698.33 2797.38,2658.7 v1@2805.89,2650.19
  other v1: 2805.89,2648
PC14: J1.37 U1.8 | length 1231.5
  Top Layer w10: U1.8 2777.69,2631.82 2786.89,2622.62 v1(2786.89,2620)
  Bottom Layer w10: J1.37 1915.8,2561.72 2164.37,2810.28 2657.59,2810.28 2777.69,2690.18 2777.69,2631.82 2786.89,2622.62 v1(2786.89,2620)
PC15: J1.38 U1.9 | length 1257.6
  Top Layer w10: U1.9 2758.01,2604.5 2766.89,2595.62 v1(2766.89,2593)
  Bottom Layer w10: J1.38 1912.02,2530.22 2172.49,2790.68 2649.35,2790.68 2758.01,2682.02 ; 2758.01,2682.03 2758.01,2604.5 2766.89,2595.62 v1(2766.89,2593)
PD0: J2.55 U1.114 | length 499.1
  Top Layer w10: U1.114 3314.06,2047.94 3367.52,1994.48 v1(3397,1994.48) v1@3395.15,1996.33
  Bottom Layer w10: v1@3397.31,1994.79 J2.55
PD1: J2.54 U1.115 | length 494.2
  Top Layer w10: U1.115 3322.38,2067.62 3364.02,2025.98 v1(3397,2025.98) v1@3395.15,2027.83
  Bottom Layer w10: v1@3397.31,2026.28 J2.54
PD2: J2.53 U1.116 | length 489.3
  Top Layer w10: U1.116 2986.44,2087.22 3330.5,2087.22 3360.25,2057.47 v1(3397,2057.47) v1@3395.15,2059.33
  Bottom Layer w10: v1@3397.31,2057.78 J2.53
PD3: J2.52 U1.117 | length 481.8
  Top Layer w10: U1.117 3016.55,2106.99 3016.72,2106.82 3338.62,2106.82 3356.47,2088.97 v1(3397,2088.97)
  Bottom Layer w10: v1@3397.31,2089.28 J2.52
PD4: J2.51 U1.118 | length 476.9
  Top Layer w10: U1.118 3388.17,2126.68 3394.38,2120.46 v1(3397,2120.46)
  Bottom Layer w10: v1@3397.31,2120.77 J2.51
PD5: J2.50 U1.119 | length 476.7
  Top Layer w10: U1.119 3388.78,2146.36 3394.38,2151.96 v1(3397,2151.96)
  Bottom Layer w10: v1@3397.31,2152.27 J2.50
PD6: J2.49 U1.122 | length 483.4
  Top Layer w10: U1.122 3363.58,2205.42 3383.71,2185.29 3395.16,2185.29 v1(3397,2183.46)
  Bottom Layer w10: v1@3397.31,2183.76 J2.49
PD7: J2.48 U1.123 | length 478.5
  Top Layer w10: U1.123 2986.44,2225.02 3371.7,2225.02 3381.77,2214.95 v1(3397,2214.95)
  Bottom Layer w10: v1@3397.31,2215.26 J2.48
PD8: J2.5 U1.77 | length 1387.5
  Top Layer w10: v1(2296,2050) 2296,2047.38 2305.25,2038.13 U1.77
  Bottom Layer w10: v1(2296,2050) 2296,2047.38 2305.25,2038.13 2305.25,1913.55 2402.7,1816.1 2910.3,1816.1 3057.49,1963.29 J2.5
PD9: J2.6 U1.78 | length 1413.5
  Top Layer w10: v1(2316,2077) 2316,2074.38 2324.94,2065.44 U1.78
  Bottom Layer w10: v1(2316,2077) 2316,2074.38 2324.94,2065.44 2324.94,1921.71 2410.85,1835.79 2902.15,1835.79 3061.14,1994.79 J2.6
PD10: J2.7 U1.79 | length 1439.5
  Top Layer w10: v1(2336,2104) 2336,2101.38 2344.62,2092.76 U1.79
  Bottom Layer w10: v1(2336,2104) 2336,2101.38 2344.62,2092.76 2344.62,1929.86 2419.01,1855.48 2893.99,1855.48 3064.8,2026.28 J2.7
PD11: J2.8 U1.80 | length 1468.4
  Top Layer w10: v1(2355,2132) 2355,2129.38 2364.31,2120.07 U1.80
  Bottom Layer w10: v1(2355,2132) 2355,2129.38 2364.31,2120.07 2364.31,1938.02 2427.16,1875.16 2885.84,1875.16 3068.46,2057.78 J2.8
PD12: J2.9 U1.81 | length 1494.4
  Top Layer w10: v1(2375,2159) 2375,2156.38 2383.99,2147.39 U1.81
  Bottom Layer w10: v1(2375,2159) 2375,2156.38 2383.99,2147.39 2383.99,1946.17 2435.32,1894.85 2877.68,1894.85 3072.11,2089.28 J2.9
PD13: J2.10 U1.82 | length 1523.2
  Top Layer w10: v1(2394,2187) 2394,2184.38 2403.68,2174.7 U1.82
  Bottom Layer w10: v1(2394,2187) 2394,2184.38 2403.68,2174.7 2403.68,1954.32 2443.47,1914.53 2869.53,1914.53 3075.77,2120.77 J2.10
PD14: J2.11 U1.85 | length 972.1
  Top Layer w10: v1@2454.22,1937.3 2462.73,1928.79 U1.85
  Bottom Layer w10: v1(2454.22,1939.49) 2866.42,1939.49 3079.2,2152.27 J2.11
PD15: J2.12 U1.86 | length 985.5
  Top Layer w10: v1(2473.22,1967.49) 2473.22,1964.87 2482.42,1955.67 U1.86 U1.86@2482.42,1878.13
  Bottom Layer w10: v1(2473.22,1967.49) 2866.7,1967.49 3082.98,2183.76 J2.12
PE0: J2.33 U1.141 | length 519.1
  Top Layer w10: U1.141 2986.44,2579.52 3223.24,2579.52 3326.27,2682.55 3389.54,2682.55 3394.38,2687.39 v1(3397,2687.39)
  Bottom Layer w10: v1@3397.31,2687.7 J2.33
PE1: J2.32 U1.142 | length 523.9
  Top Layer w10: U1.142 3215.12,2599.12 3333.04,2717.04 3395.15,2717.04 v1(3397,2718.89)
  Bottom Layer w10: v1@3397.31,2719.2 J2.32
PE2: J1.31 U1.1 | length 1378.1
  Top Layer w10: U1.1@2915.49,2708.84 2915.49,2658.7 2924,2650.19 v1(2924,2648) ; U1.1 U1.1@2915.49,2738.88
  Bottom Layer w10: J1.31 1938.47,2750.69 2115.66,2927.89 2707.11,2927.89 2915.49,2719.51 2915.49,2658.7 2924,2650.19 v1(2924,2648)
PE3: J1.32 U1.2 | length 1378
  Top Layer w10: U1.2 2895.8,2631.82 2905,2622.62 v1(2905,2620)
  Bottom Layer w10: J1.32 1934.69,2719.2 2123.78,2908.28 2698.88,2908.28 2895.8,2711.36 2895.8,2631.82 2905,2622.62 v1(2905,2620)
PE4: J1.33 U1.3 | length 1404.1
  Top Layer w10: U1.3 2876.12,2604.5 2885,2595.62 v1(2885,2593)
  Bottom Layer w10: J1.33 1930.91,2687.7 2131.9,2888.68 2690.64,2888.68 2876.12,2703.2 2876.12,2604.5 2885,2595.62 v1(2885,2593)
PE5: J1.34 U1.4 | length 1430.2
  Top Layer w10: U1.4 2856.43,2577.19 2865,2568.62 v1(2865,2566)
  Bottom Layer w10: J1.34 1927.13,2656.2 2140.01,2869.08 2682.4,2869.08 2856.43,2695.05 2856.43,2577.19 2865,2568.62 v1(2865,2566)
PE6: J1.35 U1.5 | length 1459.1
  Top Layer w10: U1.5 2836.75,2549.87 2846,2540.62 v1(2846,2538)
  Bottom Layer w10: J1.35 1923.36,2624.71 2148.13,2849.49 2674.16,2849.49 2836.75,2686.9 2836.75,2549.87 2846,2540.62 v1(2846,2538)
PE7: J1.11 U1.58 | length 504.4
  Top Layer w10: v1(1745,2152.57) 1834.14,2152.57 1906.5,2224.93 2125.28,2224.93 2125.45,2225.1 U1.58
  Bottom Layer w10: J1.11 v1@1744.69,2152.27
PE8: J1.10 U1.59 | length 509.3
  Top Layer w10: v1(1745,2121.08) 1830.36,2121.08 1914.61,2205.33 2155.56,2205.33 U1.59
  Bottom Layer w10: J1.10 v1@1744.69,2120.77
PE9: J1.9 U1.60 | length 514.2
  Top Layer w10: v1(1745,2089.58) 1747.62,2089.58 1757.04,2099 1836,2099 1922.73,2185.73 U1.60
  Bottom Layer w10: J1.9 v1@1744.69,2089.28
PE10: J1.8 U1.63 | length 518.6
  Top Layer w10: v1(1745,2058.09) 1746.61,2056.48 1758.52,2056.48 1776,2039 1846.97,2039 1934.56,2126.59 2155.56,2126.59 U1.63
  Bottom Layer w10: J1.8 v1@1744.69,2057.78
PE11: J1.7 U1.64 | length 513.9
  Top Layer w10: v1(1745,2026.59) 1747.62,2026.59 1755.21,2019 1854.69,2019 1942.51,2106.82 2125.28,2106.82 2125.45,2106.99 U1.64
  Bottom Layer w10: J1.7 v1@1744.69,2026.28
PE12: J1.6 U1.65 | length 512.5
  Top Layer w10: v1(1745,1995.09) 1858.5,1995.09 1950.63,2087.22 2155.56,2087.22 U1.65
  Bottom Layer w10: J1.6 v1@1744.69,1994.79
PE13: J1.5 U1.66 | length 517.4
  Top Layer w10: v1(1745,1963.6) 1854.72,1963.6 1958.58,2067.45 2125.28,2067.45 2125.45,2067.62 U1.66
  Bottom Layer w10: J1.5 v1@1744.69,1963.29
PE14: J1.4 U1.67 | length 522.3
  Top Layer w10: v1(1745,1932.1) 1850.95,1932.1 1966.7,2047.85 U1.67 U1.67
  Bottom Layer w10: J1.4 v1@1744.69,1931.8
PE15: J1.3 U1.68 | length 527.2
  Top Layer w10: v1(1745,1900.61) 1847.17,1900.61 1974.64,2028.08 2125.28,2028.08 2125.45,2028.25 U1.68
  Bottom Layer w10: J1.3 v1@1744.69,1900.3
PF0: J1.39 U1.10 | length 1283.7
  Top Layer w10: U1.10 2738.32,2577.19 2746.89,2568.62 v1(2746.89,2566)
  Bottom Layer w10: J1.39 1908.25,2498.72 2180.61,2771.08 2641.11,2771.08 2738.32,2673.87 2738.32,2577.19 2746.89,2568.62 v1(2746.89,2566)
PF1: J1.40 U1.11 | length 1312.6
  Top Layer w10: U1.11 2718.64,2549.87 2727.89,2540.62 v1(2727.89,2538)
  Bottom Layer w10: J1.40 1866.94,2468.13 1905.37,2468.13 2188.73,2751.49 2632.87,2751.49 2718.64,2665.72 2718.64,2549.87 2727.89,2540.62 v1(2727.89,2538)
PF2: J1.41 U1.12 | length 1338.5
  Top Layer w10: U1.12 2698.95,2522.56 2707.89,2513.62 v1(2707.89,2511)
  Bottom Layer w10: J1.41 1866.94,2436.64 1901.6,2436.64 2196.84,2731.89 2624.39,2731.89 2698.95,2657.32 2698.95,2522.56 2707.89,2513.62 v1(2707.89,2511)
PF3: J1.42 U1.13 | length 1393.4
  Top Layer w10: U1.13 2679.27,2495.24 2687.89,2486.62 v1(2687.89,2484)
  Bottom Layer w10: J1.42 1866.94,2405.14 1946.74,2405.14 1952.6,2411 1952.6,2459.92 2204.96,2712.28 2616.27,2712.28 2679.27,2649.29 2679.27,2495.24 2687.89,2486.62 v1(2687.89,2484)
PF4: J1.43 U1.14 | length 1425.8
  Top Layer w10: U1.14 2659.58,2467.93 2668.89,2458.62 v1(2668.89,2456)
  Bottom Layer w10: J1.43 1866.94,2373.65 1948.77,2373.65 1972.2,2397.07 1972.2,2451.8 2213,2692.6 2267.73,2692.6 2267.81,2692.68 2608.15,2692.68 2659.58,2641.26 2659.58,2467.93 2668.89,2458.62 v1(2668.89,2456)
PF5: J1.44 U1.15 | length 1451.8
  Top Layer w10: U1.15 2639.9,2440.61 2648.89,2431.62 v1(2648.89,2429)
  Bottom Layer w10: J1.44 1944.09,2341.24 1991.8,2388.96 1991.8,2443.69 2221.11,2673 2600,2673 2639.9,2633.1 2639.9,2440.61 2648.89,2431.62 v1(2648.89,2429)
PF6: J1.45 U1.18 | length 960.4
  Top Layer w10: U1.18@2580.84,2708.84 2580.84,2658.7 2589.35,2650.19 v1(2589.35,2648)
  Bottom Layer w10: J1.45 1940.31,2309.75 2011.4,2380.84 2011.4,2435.57 2222.83,2647 v1@2590.35,2647
PF7: J1.46 U1.19 | length 971.1
  Top Layer w10: U1.19 2561.16,2631.82 2570.35,2622.62 v1(2570.35,2620)
  Bottom Layer w10: J1.46 1936.53,2278.25 2031,2372.72 2031,2427.45 2223.55,2620 v1(2570.35,2620)
PF8: J1.47 U1.20 | length 980.4
  Top Layer w10: U1.20 2541.47,2604.5 2550.35,2595.62 v1(2550.35,2593)
  Bottom Layer w10: J1.47 1932.76,2246.76 2050.6,2364.6 2050.6,2419.33 2223.27,2592 v1@2551.35,2592
PF9: J1.48 U1.21 | length 989.1
  Top Layer w10: U1.21 2521.79,2577.19 2530.35,2568.62 v1(2530.35,2566)
  Bottom Layer w10: J1.48 1928.98,2215.26 2070.2,2356.48 2070.2,2411.21 2223.99,2565 v1@2531.35,2565
PF10: J1.49 U1.22 | length 1000.2
  Top Layer w10: U1.22 2502.1,2549.87 2511.35,2540.62 v1(2511.35,2538)
  Bottom Layer w10: J1.49 1926.76,2183.76 2089.8,2346.8 2089.8,2403.09 2224.71,2538 v1(2511.35,2538)
PF11: J1.18 U1.49 | length 486.4
  Top Layer w10: v1(1745,2373.05) 1746.85,2374.9 1756.9,2374.9 1784.27,2402.27 U1.49
  Bottom Layer w10: J1.18 v1@1744.69,2372.74
PF12: J1.17 U1.50 | length 491.3
  Top Layer w10: v1(1745,2341.55) 1746.85,2343.4 1755.4,2343.4 1794.58,2382.58 U1.50
  Bottom Layer w10: J1.17 v1@1744.69,2341.24
PF13: J1.16 U1.53 | length 489
  Top Layer w10: v1(1745,2310.05) 1746.85,2308.2 1756.8,2308.2 1766,2299 1841.97,2299 1866.41,2323.44 U1.53@2155.56,2323.44
  Bottom Layer w10: J1.16 v1@1744.69,2309.75
PF14: J1.15 U1.54 | length 484.8
  Top Layer w10: v1(1745,2278.56) 1849.25,2278.56 1874.36,2303.67 2125.28,2303.67 2125.45,2303.84 U1.54
  Bottom Layer w10: J1.15 v1@1744.69,2278.25
PF15: J1.14 U1.55 | length 489.7
  Top Layer w10: v1(1745,2247.06) 1845.47,2247.06 1882.48,2284.07 2155.56,2284.07 U1.55
  Bottom Layer w10: J1.14 v1@1744.69,2246.76
PG0: J1.13 U1.56 | length 494.6
  Top Layer w10: v1(1745,2215.57) 1841.69,2215.57 1890.43,2264.3 2125.28,2264.3 2125.45,2264.47 U1.56
  Bottom Layer w10: J1.13 v1@1744.69,2215.26
PG1: J1.12 U1.57 | length 499.5
  Top Layer w10: v1(1745,2184.07) 1746.85,2185.92 1839.77,2185.92 1898.55,2244.7 2155.56,2244.7 U1.57
  Bottom Layer w10: J1.12 v1@1744.69,2183.76
PG2: J2.13 U1.87 | length 994.2
  Top Layer w10: v1(2493.22,1994.49) 2493.22,1991.87 2502.1,1982.99 U1.87@2502.1,1878.13
  Bottom Layer w10: v1(2493.22,1994.49) 2865.98,1994.49 3086.75,2215.26 J2.13
PG3: J2.14 U1.88 | length 1003
  Top Layer w10: v1(2513.22,2021.49) 2513.22,2018.87 2521.79,2010.3 U1.88 U1.88@2521.79,1878.13
  Bottom Layer w10: v1(2513.22,2021.49) 2865.26,2021.49 3090.53,2246.76 J2.14
PG4: J2.15 U1.89 | length 1013.7
  Top Layer w10: v1(2532.22,2049.49) 2532.22,2046.87 2541.47,2037.62 U1.89 U1.89@2541.47,1878.13
  Bottom Layer w10: v1(2532.22,2049.49) 2865.55,2049.49 3094.31,2278.25 J2.15
PG5: J2.16 U1.90 | length 1022.4
  Top Layer w10: v1(2552.22,2076.49) 2552.22,2073.87 2561.16,2064.93 U1.90@2561.16,1878.13
  Bottom Layer w10: v1(2552.22,2076.49) 2864.83,2076.49 3098.09,2309.75 J2.16
PG6: J2.17 U1.91 | length 1031.1
  Top Layer w10: v1(2572.22,2103.49) 2572.22,2100.87 2580.84,2092.25 U1.91 U1.91@2580.84,1878.13
  Bottom Layer w10: v1(2572.22,2103.49) 2864.11,2103.49 3089.97,2329.35 3206.35,2329.35 3218.24,2341.24 J2.17
PG7: J2.18 U1.92 | length 1041.9
  Top Layer w10: v1(2591.22,2131.49) 2591.22,2128.87 2600.53,2119.56 U1.92@2600.53,1878.13
  Bottom Layer w10: v1(2591.22,2131.49) 2864.39,2131.49 3081.9,2349 3196,2349 3219.74,2372.74 J2.18
PG8: J2.19 U1.93 | length 1050.8
  Top Layer w10: v1(2611.22,2158.49) 2611.22,2155.87 2620.21,2146.88 U1.93 U1.93@2620.21,1878.13
  Bottom Layer w10: v1(2611.22,2158.49) 2863.67,2158.49 3109.61,2404.43 3275.77,2404.43 J2.19
PG9: J2.47 U1.124 | length 475
  Top Layer w10: U1.124 2986.7,2245.13 3395.68,2245.13 v1(3397,2246.45)
  Bottom Layer w10: v1@3397.31,2246.76 J2.47
PG10: J2.46 U1.125 | length 479.9
  Top Layer w10: U1.125 3379.89,2264.47 3391.51,2276.09 3395.15,2276.09 v1(3397,2277.94)
  Bottom Layer w10: v1@3397.31,2278.25 J2.46
PG11: J2.45 U1.126 | length 484.8
  Top Layer w10: U1.126 3363.16,2284.16 3386.59,2307.59 3395.15,2307.59 v1(3397,2309.44)
  Bottom Layer w10: v1@3397.31,2309.75 J2.45
PG12: J2.44 U1.127 | length 489.7
  Top Layer w10: U1.127 3351.84,2303.84 3387.08,2339.08 3395.15,2339.08 v1(3397,2340.94)
  Bottom Layer w10: v1@3397.31,2341.24 J2.44
PG13: J2.43 U1.128 | length 494.6
  Top Layer w10: U1.128 3339.53,2323.53 3386.58,2370.58 3395.15,2370.58 v1(3397,2372.43)
  Bottom Layer w10: v1@3397.31,2372.74 J2.43
PG14: J2.42 U1.129 | length 499.5
  Top Layer w10: U1.129 3328.21,2343.21 3387.08,2402.08 3395.15,2402.08 v1(3397,2403.93)
  Bottom Layer w10: v1@3397.31,2404.24 J2.42
PG15: J2.41 U1.132 | length 488.1
  Top Layer w10: U1.132 2986.44,2402.35 3267.82,2402.35 3300.89,2435.43 v1(3397,2435.43)
  Bottom Layer w10: v1@3397.31,2435.73 J2.41
VBUS: C4.2 C5.2 C23.2 C24.2 IC1.3 J1.59 J1.60 P2.1 TP1.1 | length 1691.3
  Top Layer w18: v2(1846,1784) 1846,1739 1772,1665 1772,1608.88 C4.2 1772,1596.88 1772,1535 C5.2 1772,1523 1772,1488 1789.25,1470.75 IC1.3 1877.74,1458.14 1906.86,1458.14 1931,1434 2601,1434 ; TP1.1 2601,1434 ; P2.1 2787.82,1460.82 2761,1434 2601,1434
  Bottom Layer w10: J1.59@1845,1867.9 1845.91,1868.8 J1.59 ; J1.60@1846,1837.31 J1.60
  Bottom Layer w18: v2(1846,1784) 1846,1837.31 J1.59@1846,1865
VCC_3V3: C6.2 C7.2 C8.2 C9.2 C10.2 C11.2 C12.2 C13.2 C14.2 C15.2 C16.2 C17.2 C18.2 C19.2 C20.2 C21.2 C22.2 IC1.2 J1.57 J1.58 P1.4 R2.1 R3.2 TP2.1 U1.6 U1.17 U1.30 U1.32 U1.33 U1.39 U1.52 U1.62 U1.72 U1.84 U1.95 U1.108 U1.121 U1.131 U1.144 | length 8124.8
  Top Layer w6: U1.52 2200.79,2343.21 2208,2336 2208,2245 2250,2203 2250,2183 ; U1.39 2202.95,2599.12 2206.47,2602.63 2206.47,2758.47 2217,2769 2285.57,2769 ; U1.62@2155.99,2146.02 2198.98,2146.02 2206,2139 ; U1.72@2186.01,1949.86 2195.55,1949.86 2206,1960.3 2206,2139 ; U1.32 2305.25,2238.25 ; U1.121 2935.27,2185.73 2892,2229 2892,2420 2837.79,2474.21 2837.79,2492.11 2819.89,2510 ; U1.131 2938.51,2382.58 2935,2386.1 2935,2464 v1(2895.93,2503.07) 2892.51,2503.07 2885.58,2510 2819.89,2510 ; U1.144 2997.32,2638.49 3000,2641.17 v1(3000,2675) ; 2206,2139 2250,2183 ; 2250,2183 2305.25,2238.25 ; 2305.25,2238.25 2528.25,2238.25 2800,2510 2819.89,2510
  Top Layer w10: C17.2@2057.26,2156.15 2067.05,2146.36 U1.62 U1.62@2155.99,2146.02 ; C16.2 2067.05,2343.21 U1.52 ; C22.2@2057.26,2608.91 2067.05,2599.12 U1.39 ; v2(2096,1804) 2061.49,1838.51 2061.49,1935.5 C18.2 2067.05,1949.51 2185.66,1949.51 U1.72@2186.01,1949.86 ; R3.2@2216.22,1661 2151,1661 2113.5,1698.5 2245.5,1698.5 2327.26,1780.26 C19.2 ; C8.2 2285.57,2807.74 C9.2@2290.46,2802.85 ; U1.33 2285.57,2769 2285.57,2797.95 C9.2@2290.46,2802.85 ; U1.32 2305.25,2797.95 C9.2@2295.46,2807.74 ; C11.2 C9.2@2295.46,2807.74 ; U1.30 C11.2@2344.62,2807.74 ; U1.84 C19.2 ; TP2.1 v1(2501,1529) ; v1(2501,1699) 2500.45,1699.55 2500.45,1780.26 ; U1.17 C10.2 C12.2 ; U1.95 C20.2 2500.45,1780.26 ; U1.6 C12.2 ; U1.108 2915.49,1859.84 2916.32,1859 3079.9,1859 C21.2@3079.9,1854.83 ; U1.121 3074.95,2185.73 C15.2@3084.74,2175.94 ; U1.131 3074.95,2382.58 C14.2@3084.74,2372.8 ; U1.144@2997.32,2638.49 3074.95,2638.49 3084.74,2648.28 C13.2 3080.41,2652.82 3080.41,2664.59 3009,2736 2964,2736 2918,2782 2918,2801.24 2917.36,2801.89 2917.36,2810.25 R2.1 2906.61,2818.49 2895.86,2807.74 C12.2 ; C21.2 3084.74,1812.17 P1.4 ; C9.2@2290.46,2802.85 C9.2 C9.2@2295.46,2807.74 ; C19.2 2500.45,1780.26
  Top Layer w15: C7.2 2103,1737.91 2103,1709 2113.5,1698.5 ; R3.2@2219.22,1658 R3.2
  Top Layer w20: IC1.2 1875.83,1572.01 1909.01,1572.01 2016.35,1679.35 2016.35,1740.27 C6.2 C7.2 ; C7.2@2096,1747.12 v2(2096,1804)
  Bottom Layer w6: v1(2895.93,2503.07) 2895.93,2546.93 2909,2560 2929,2560 3000,2631 v1(3000,2675)
  Bottom Layer w10: J1.58 1999.7,1900.3 1968.2,1931.8 J1.57 ; v1(2501,1529) 2501,1614 ; v1(2501,1699) 2501,1614 ; P1.4 2992.91,1614 2501,1614
  Bottom Layer w20: 1999.7,1900.3 v2(2096,1804)
pads on no net: IC1.4 P2.4

## Polygon pours and split planes (outlines as drawn)
GND on Bottom Layer "NONET_L01_P-001" (solid, remove dead copper, pour order 7): 3511,1541.8 cw(c3373.21,1541.79) 3373.2,1404 1768.8,1404 cw(c1768.79,1541.79) 1631,1541.8 1631,2811.2 cw(c1768.8,2811.2) 1768.8,2949 3373.21,2949 cw(c3373.21,2811.21) 3511,2811.2 3511,1865
GND on Top Layer "NONET_L01_P-001" (solid, remove dead copper, pour order 3): 3511,1541.8 cw(c3373.21,1541.79) 3373.2,1404 1768.8,1404 cw(c1768.79,1541.79) 1631,1541.8 1631,2811.2 cw(c1768.8,2811.2) 1768.8,2949 3373.21,2949 cw(c3373.21,2811.21) 3511,2811.2 3511,1865

## Silkscreen, mask and mechanical layers (free items; w line width, h text height)
Top Overlay:
  lines w15: 1631,1541.8 ccw(c1768.8,1541.8) 1768.8,1404 2691,1404 3373.2,1404 ccw(c3373.2,1541.8) 3511,1541.8 3511,2811.2 ccw(c3373.2,2811.2) 3373.2,2949 1768.8,2949 ccw(c1768.8,2811.2) 1631,2811.2 1631,2069 1631,1541.8
  text "Based on STM32F407ZET6 | by Power Lin" at 1675,2804.83 h30 r270
  text "RST" at 1851.01,2799 h30
  text "RobotCtrl_V2_Core-board" at 3438.34,2723.19 h40 r270
  text "3V3" at 3201.01,1744 h30
  text "V2.1" at 3395.68,1686 h28
  text "PWR/Slave" at 3036,1675 h30 r270
  text "DIO" at 3201.01,1649 h30
  text "BETA" at 3392.35,1642 h26
  text "CLK" at 3201.01,1544 h30
  text "GND" at 3201.01,1444 h30
  text "GND" at 2361.01,1419 h30
  text "3V3" at 2461.01,1419 h30
  text "5V" at 2576.01,1419 h30
Bottom Overlay:
  lines w15: 1631,1541.8 ccw(c1768.8,1541.8) 1768.8,1404 2691,1404 3373.2,1404 ccw(c3373.2,1541.8) 3511,1541.8 3511,2811.2 ccw(c3373.2,2811.2) 3373.2,2949 1768.8,2949 ccw(c1768.8,2811.2) 1631,2811.2 1631,2069 1631,1541.8
Mechanical 1:
  lines w10: 1631,1541.8 ccw(c1768.8,1541.8) 1768.8,1404 2691,1404 3373.2,1404 ccw(c3373.2,1541.8) 3511,1541.8 3511,2811.2 ccw(c3373.2,2811.2) 3373.2,2949 1768.8,2949 ccw(c1768.8,2811.2) 1631,2811.2 1631,2069 1631,1541.8